# Altium PCB H_Bridge.PcbDoc
Units mm, origin at the board's own origin, x right, y up, seen from the top; angles counter-clockwise.
Board outline 48.39 x 49.28 mm, 2 copper layers (Top Layer, Bottom Layer); 27 components, 16 nets, 72 pads, 395 vias.
Unrouted connection lines stored in the file: 4.
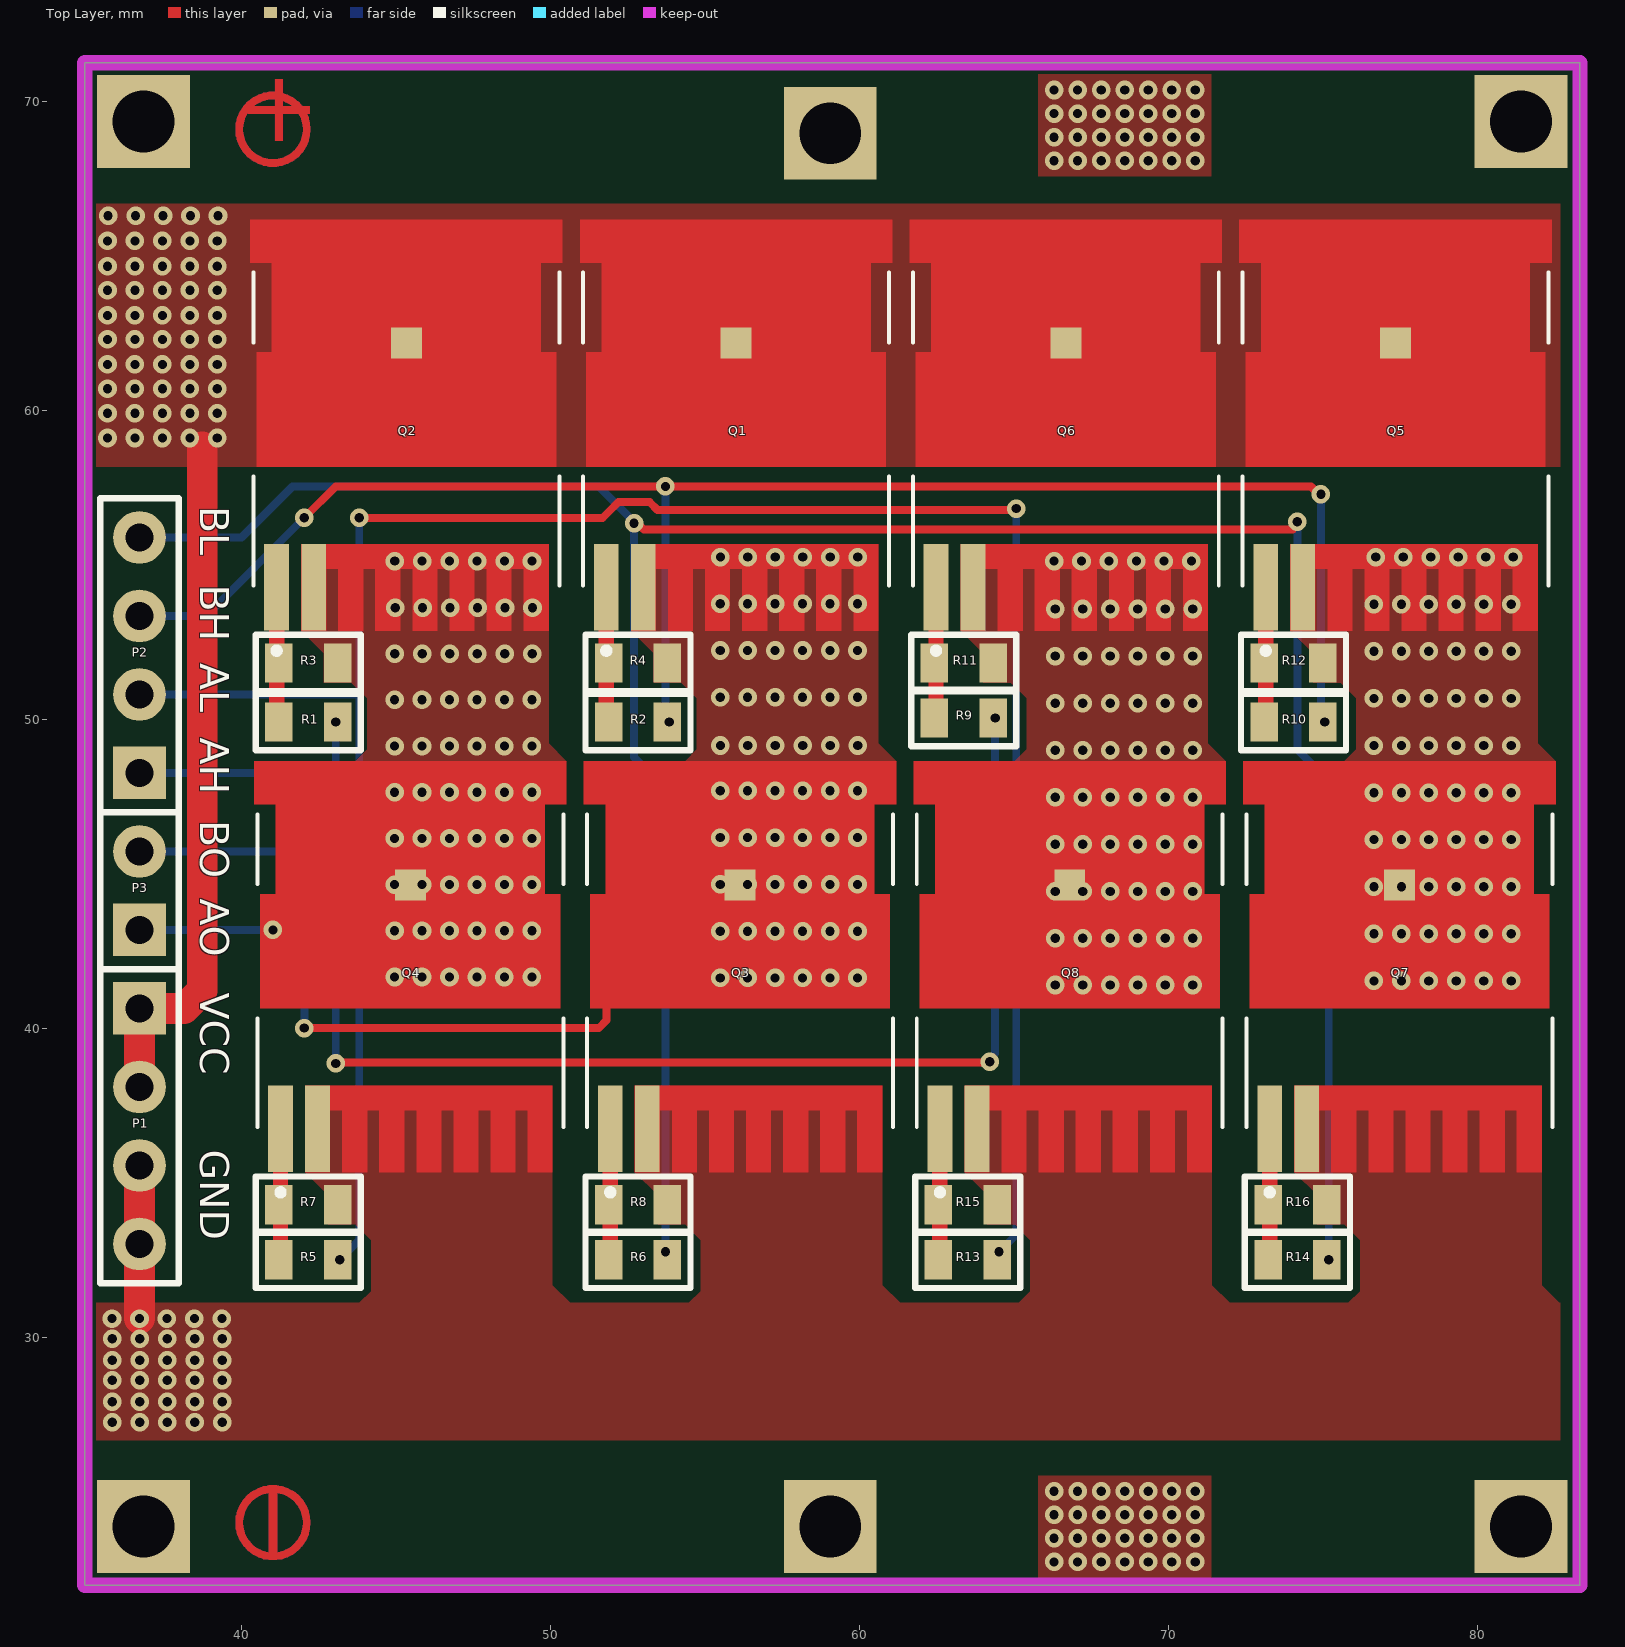
[diagram p0: Top Layer view]
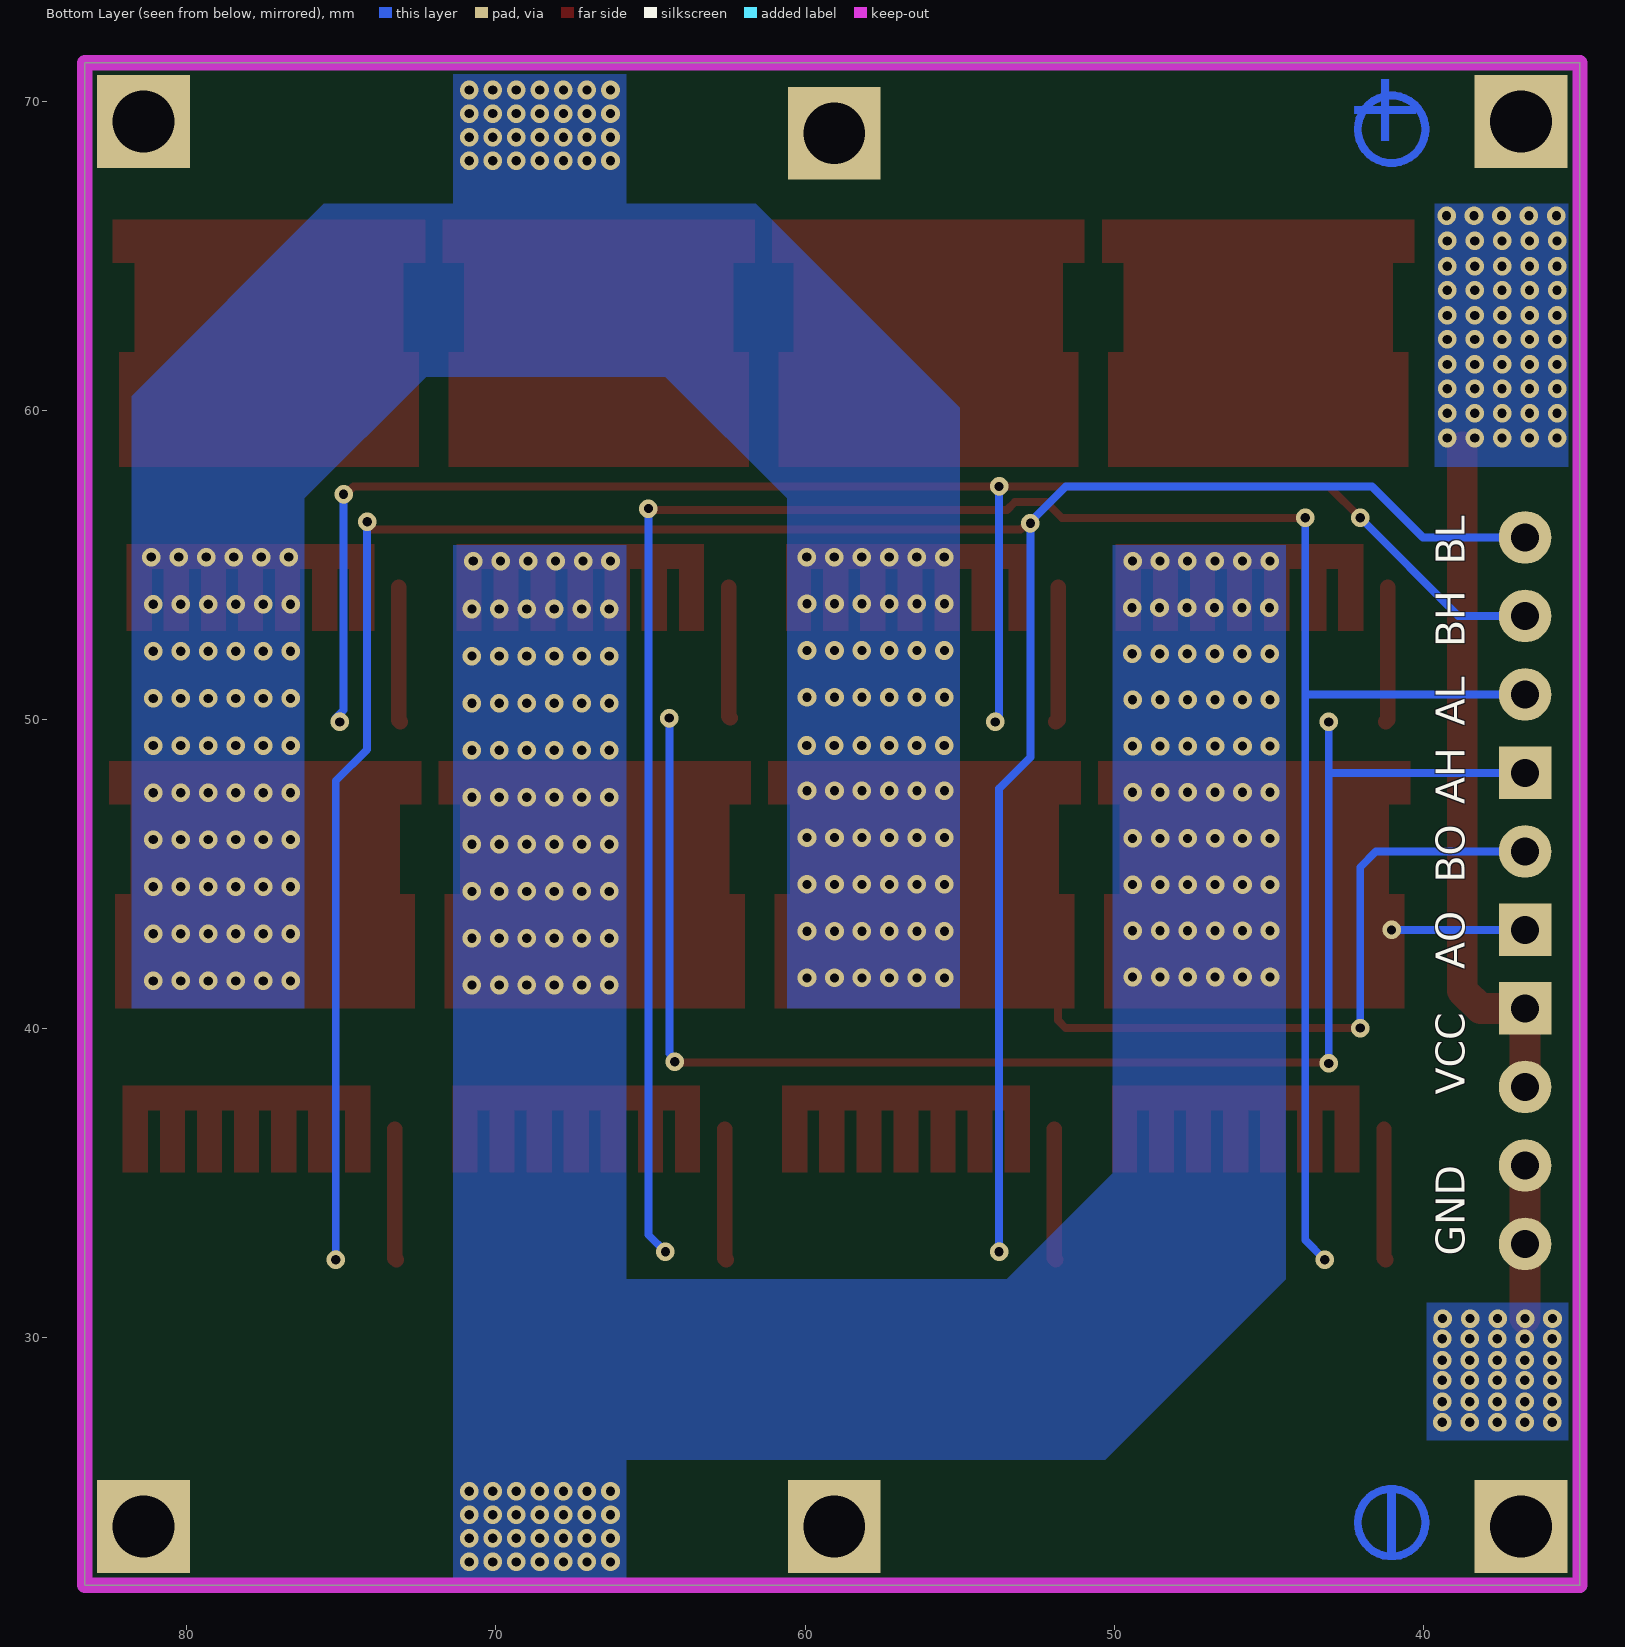
[diagram p1: Bottom Layer view, seen from below]

## Layer stack, top to bottom
Top Solder: solder mask 0.0102, Solder Resist, Dk 3.5
Top Layer: signal copper 0.0356
Dielectric 1: dielectric 0.32, FR-4, Dk 4.8
Bottom Layer: signal copper 0.0356
Bottom Solder: solder mask 0.0102, Solder Resist, Dk 3.5

## Board outline
34.925,21.971 83.312,21.971 83.312,71.247 34.925,71.247

## Design rules (kind name [scope] priority, off if disabled: settings)
Clearance [All] p1: gap=0.254 ignorepadtopadclearanceinfootprint=FALSE except(0: Arc-Hole Track-Hole SMDPad-Hole THPad-Hole Via-Hole Fill-Hole Poly-Hole Region-Hole Text-Hole)
PolygonConnect [All] p1: connectstyle=Direct reliefconductorwidth=0.254 reliefentries=4 polygonreliefangle="90 Angle" airgapwidth=0.254
RoutingVias [All] p1: holewidth=0.3 width=0.6 viastyle="Through Hole" minholewidth=0.3 minwidth=0.6 maxholewidth=0.711 maxwidth=1.27
SolderMaskExpansion [All] p1: expansion=0.102 istentingtop=FALSE
Width [All] p1: maxlimit=10 minlimit=0.254 preferedwidth=0.254
30 further rules are at their usual default settings.

## Components (designator, comment, footprint, x,y, rotation, side; value= is the part's Value field where it differs from the comment)
P1 "Header 4" HDR2.54-LI-4P 36.703,36.83 r270 top
P2 "Header 4" HDR2.54-LI-4P 36.703,52.07 r90 top
P3 "Header 2" HDR2.54-LI-2P 36.703,44.45 r90 top
Q1 "IPT015N10N5" HSOF-8 56.007,59.517 r90 top
Q2 "IPT015N10N5" HSOF-8 45.339,59.517 r90 top
Q3 "IPT015N10N5" HSOF-8 56.134,41.991 r90 top
Q4 "IPT015N10N5" HSOF-8 45.466,41.991 r90 top
Q5 "IPT015N10N5" HSOF-8 77.343,59.517 r90 top
Q6 "IPT015N10N5" HSOF-8 66.675,59.517 r90 top
Q7 "IPT015N10N5" HSOF-8 77.47,41.991 r90 top
Q8 "IPT015N10N5" HSOF-8 66.802,41.991 r90 top
R1 "0805" "R 0805_L" 42.164,49.911 r180 top value=1.8R
R2 "0805" "R 0805_L" 52.832,49.911 r0 top value=1.8R
R3 "0805" "R 0805_L" 42.164,51.816 r0 top value=10K
R4 "0805" "R 0805_L" 52.832,51.816 r180 top value=10K
R5 "0805" "R 0805_L" 42.164,32.512 r180 top value=1.8R
R6 "0805" "R 0805_L" 52.832,32.512 r0 top value=1.8R
R7 "0805" "R 0805_L" 42.164,34.29 r0 top value=10K
R8 "0805" "R 0805_L" 52.832,34.29 r180 top value=10K
R9 "0805" "R 0805_L" 63.373,50.038 r180 top value=1.8R
R10 "0805" "R 0805_L" 74.041,49.911 r0 top value=1.8R
R11 "0805" "R 0805_L" 63.373,51.816 r0 top value=10K
R12 "0805" "R 0805_L" 74.041,51.816 r180 top value=10K
R13 "0805" "R 0805_L" 63.5,32.512 r180 top value=1.8R
R14 "0805" "R 0805_L" 74.168,32.512 r0 top value=1.8R
R15 "0805" "R 0805_L" 63.5,34.29 r0 top value=10K
R16 "0805" "R 0805_L" 74.168,34.29 r180 top value=10K

## Footprints (in the part's own frame and the unit in brackets; to place one, negate y for a bottom-side part, rotate by r counter-clockwise, add the part's x,y. Pads: shape width x height; smd on the part's side, far side on the other; paste and mask are expansions set on the pad)
HDR2.54-LI-2P [mm] "排针，2脚"
  rect 1.7x1.7 hole 0.9: 1(-1.27,0)
  round 1.7 hole 0.9: 2(1.27,0)
  silkscreen extent -2.54,-1.27 2.54,1.27, body extent -2.54,-1.27 2.54,1.27, height 8.5
HDR2.54-LI-4P [mm] "排针，4脚"
  rect 1.7x1.7 hole 0.9: 1(-3.81,0)
  round 1.7 hole 0.9: 2(-1.27,0) 3(1.27,0) 4(3.81,0)
  silkscreen extent -5.08,-1.27 5.08,1.27, body extent -5.08,-1.27 5.08,1.27, height 8.5
HSOF-8 [mm]
  rect 2.8x0.8 smd: 1(-5.25,4.2) 2-8(-5.25,3)
  rect 1x1 smd: 9(2.65,0)
  Top Layer region: -1.35,-4.85 -1.35,4.85 2.35,4.85 2.35,4.35 5.25,4.35 5.25,5.05 6.65,5.05 6.65,-5.05 5.25,-5.05 5.25,-4.35 2.35,-4.35 2.35,-4.85
  Top Layer region: -6.65,3.4 -3.85,3.4 -3.85,-4.6 -6.65,-4.6 -6.65,-3.8 -4.65,-3.8 -4.65,-3.4 -6.65,-3.4 -6.65,-2.6 -4.65,-2.6 -4.65,-2.2 -6.65,-2.2 -6.65,-1.4 -4.65,-1.4 -4.65,-1 -6.65,-1 -6.65,-0.2 -4.65,-0.2 -4.65,0.2 -6.65,0.2 -6.65,1 -4.65,1 -4.65,1.4 -6.65,1.4 -6.65,2.2 -4.65,2.2 -4.65,2.6 -6.65,2.6
  silkscreen extent -7.4,-4.95 4.93,4.95, body extent -6.62,-5.08 6.6,5.08, height 2
"R 0805_L" [mil] "1/8W贴片电阻"
  rect 35x50 smd: 1(-37.4,0) 2(37.4,0)
  silkscreen extent -67,-36 67,36, body extent -39,-25 39,25, height 20

## Part data
P1 P2: "Header, 4-Pin", LatestRevisionDate=17-Jul-2002, LatestRevisionNote="Re-released for DXP Platform.", Publisher="Altium Limited"
P3: "Header, 2-Pin", LatestRevisionDate=17-Jul-2002, LatestRevisionNote="Re-released for DXP Platform.", Publisher="Altium Limited"
Q1 Q2 Q3 Q4 Q5 Q6 Q7 Q8: library part NMOS-HSOF-8
R1 R2 R3 R4 R5 R6 R7 R8 R9 R10 R11 R12 R13 R14 R15 R16: library part RES2, "Resistor", LatestRevisionDate=17-Jul-2002, LatestRevisionNote="Re-released for DXP Platform.", PackageDescription="Axial Device, Thru-Hole; 2 Leads; 0.3 in Pin Spacing", PackageReference=AXIAL-0.3, Published=8-Jun-2000, Publisher="Altium Limited"

## Free pads (board coordinates)
  rect 3x3 hole 2: 0(36.83,23.876) 0(36.83,69.342) 0(59.055,23.876) 0(59.055,68.961) 0(81.407,23.876) 0(81.407,69.342)

## Via types
v1: diameter 0.6, hole 0.3, Top Layer to Bottom Layer, tented both sides, 395 vias

## Nets (pads, with @x,y where several pads share a name; then routed paths per layer and width w, separated by ;. In a path a pad name is that pad's centre, name@x,y a point inside that pad or via, vN(x,y) a via of type N, cw(c..) or ccw(c..) an arc to the next point about the centre after c; other vN are vias at no path point)
AH: P2.1 R1.1 R9.1 | length 49.8
  Top Layer w0.254: v1(43.053,38.862) 43.082,38.891 64.187,38.891 v1(64.216,38.921)
  Bottom Layer w0.254: P2.1 43.053,48.26 ; v1(43.053,38.862) 43.053,48.26 ; v1(43.053,49.911) 43.053,48.26 ; v1(64.216,38.921) 64.216,39.014 64.389,39.187 v1(64.389,50.038)
AL: P2.2 R5.1 R13.1 | length 77.2
  Top Layer w0.254: v1(43.815,56.515) 51.689,56.515 52.197,57.023 53.213,57.023 53.467,56.769 65.021,56.769 v1(65.067,56.815)
  Bottom Layer w0.254: P2.2 43.815,50.8 ; v1(43.18,32.512) 43.815,33.147 43.815,50.8 ; v1(43.815,56.515) 43.815,50.8 ; v1(64.516,32.766) 65.07,33.32 65.07,56.812 v1(65.067,56.815)
AO: P3.1 Q2.2-8 Q4.9 Q6.2-8 Q8.9 R3.2 R11.2 | length 4.3
  Bottom Layer w0.254: P3.1 v1(41.021,43.18)
  other v1: 66.294,22.733 67.056,22.733 67.818,22.733 68.58,22.733 69.342,22.733 70.104,22.733 70.866,22.733 66.294,23.495 67.056,23.495 67.818,23.495 68.58,23.495 69.342,23.495 70.104,23.495 70.866,23.495 66.294,24.257 67.056,24.257 67.818,24.257 68.58,24.257 69.342,24.257 70.104,24.257 70.866,24.257 66.294,25.019 67.056,25.019 67.818,25.019 68.58,25.019 69.342,25.019 70.104,25.019 70.866,25.019 66.334,41.399 67.223,41.399 68.112,41.399 69.001,41.399 69.89,41.399 70.779,41.399 44.955,41.659 45.844,41.659 46.733,41.659 47.622,41.659 48.511,41.659 49.4,41.659 66.334,42.913 67.223,42.913 68.112,42.913 69.001,42.913 69.89,42.913 70.779,42.913 44.955,43.153 45.844,43.153 46.733,43.153 47.622,43.153 48.511,43.153 49.4,43.153 66.334,44.426 67.223,44.426 68.112,44.426 69.001,44.426 69.89,44.426 70.779,44.426 44.955,44.648 45.844,44.648 46.733,44.648 47.622,44.648 48.511,44.648 49.4,44.648 66.334,45.95 67.223,45.95 68.112,45.95 69.001,45.95 69.89,45.95 70.779,45.95 44.955,46.142 45.844,46.142 46.733,46.142 47.622,46.142 48.511,46.142 49.4,46.142 66.334,47.473 67.223,47.473 68.112,47.473 69.001,47.473 69.89,47.473 70.779,47.473 44.955,47.637 45.844,47.637 46.733,47.637 47.622,47.637 48.511,47.637 49.4,47.637 66.334,48.996 67.223,48.996 68.112,48.996 69.001,48.996 69.89,48.996 70.779,48.996 44.955,49.132 45.844,49.132 46.733,49.132 47.622,49.132 48.511,49.132 49.4,49.132 66.334,50.519 67.223,50.519 68.112,50.519 69.001,50.519 69.89,50.519 70.779,50.519 44.955,50.626 45.844,50.626 46.733,50.626 47.622,50.626 48.511,50.626 49.4,50.626 66.334,52.042 67.223,52.042 68.112,52.042 69.001,52.042 69.89,52.042 70.779,52.042 44.965,52.121 45.854,52.121 46.743,52.121 47.632,52.121 48.521,52.121 49.41,52.121 66.334,53.566 67.223,53.566 68.112,53.566 69.001,53.566 69.89,53.566 70.779,53.566 44.974,53.606 45.863,53.606 46.752,53.606 47.641,53.606 48.53,53.606 49.419,53.606 44.958,55.118 45.847,55.118 46.736,55.118 47.625,55.118 48.514,55.118 49.403,55.118 66.294,55.118 67.183,55.118 68.072,55.118 68.961,55.118 69.85,55.118 70.739,55.118
BH: P2.3 R2.2 R10.2 | length 55.3
  Top Layer w0.254: v1(42.037,56.515) 43.053,57.531 v1(53.721,57.531) 74.608,57.531 74.862,57.277 v1(74.93,57.277)
  Bottom Layer w0.254: P2.3 38.862,53.34 v1(42.037,56.515) ; v1(53.721,57.531) 53.721,50.132 53.848,50.005 v1(53.848,49.911) ; v1(74.93,57.277) 74.93,50.292 75.184,50.038 v1(75.057,49.911)
BL: P2.4 R6.2 R14.2 | length 87.2
  Top Layer w0.254: v1(52.705,56.342) 52.819,56.342 53.027,56.134 74.019,56.134 74.019,56.146 74.168,56.294 v1(74.168,56.388)
  Bottom Layer w0.254: P2.4 40.005,55.88 41.656,57.531 51.562,57.531 52.705,56.388 52.705,48.768 53.721,47.752 v1(53.721,32.766) ; v1(74.168,56.388) 74.168,49.022 75.184,48.006 v1(75.184,32.512)
BO: P3.2 Q1.2-8 Q3.9 Q5.2-8 Q7.9 R4.1 R12.1 | length 21.1
  Top Layer w0.254: v1(42.037,40.005) 51.562,40.005 51.816,40.259 51.816,40.767
  Bottom Layer w0.254: P3.2 41.529,45.72 42.037,45.212 v1(42.037,40.005)
  other v1: 76.645,41.532 77.534,41.532 78.423,41.532 79.312,41.532 80.201,41.532 81.09,41.532 55.49,41.628 56.379,41.628 57.268,41.628 58.157,41.628 59.046,41.628 59.935,41.628 76.645,43.057 77.534,43.057 78.423,43.057 79.312,43.057 80.201,43.057 81.09,43.057 55.49,43.141 56.379,43.141 57.268,43.141 58.157,43.141 59.046,43.141 59.935,43.141 76.645,44.582 77.534,44.582 78.423,44.582 79.312,44.582 80.201,44.582 81.09,44.582 55.49,44.655 56.379,44.655 57.268,44.655 58.157,44.655 59.046,44.655 59.935,44.655 76.645,46.107 77.534,46.107 78.423,46.107 79.312,46.107 80.201,46.107 81.09,46.107 55.49,46.169 56.379,46.169 57.268,46.169 58.157,46.169 59.046,46.169 59.935,46.169 76.645,47.622 77.534,47.622 78.423,47.622 79.312,47.622 80.201,47.622 81.09,47.622 55.49,47.682 56.379,47.682 57.268,47.682 58.157,47.682 59.046,47.682 59.935,47.682 55.499,49.149 56.388,49.149 57.277,49.149 58.166,49.149 59.055,49.149 59.944,49.149 76.645,49.147 77.534,49.147 78.423,49.147 79.312,49.147 80.201,49.147 81.09,49.147 76.645,50.671 77.534,50.671 78.423,50.671 79.312,50.671 80.201,50.671 81.09,50.671 55.49,50.71 56.379,50.71 57.268,50.71 58.157,50.71 59.046,50.71 59.935,50.71 76.645,52.196 77.534,52.196 78.423,52.196 79.312,52.196 80.201,52.196 81.09,52.196 55.49,52.223 56.379,52.223 57.268,52.223 58.157,52.223 59.046,52.223 59.935,52.223 76.645,53.721 77.534,53.721 78.423,53.721 79.312,53.721 80.201,53.721 81.09,53.721 55.49,53.737 56.379,53.737 57.268,53.737 58.157,53.737 59.046,53.737 59.935,53.737 55.499,55.245 56.388,55.245 57.277,55.245 58.166,55.245 59.055,55.245 59.944,55.245 76.708,55.245 77.597,55.245 78.486,55.245 79.375,55.245 80.264,55.245 81.153,55.245 66.294,68.072 67.056,68.072 67.818,68.072 68.58,68.072 69.342,68.072 70.104,68.072 70.866,68.072 66.294,68.834 67.056,68.834 67.818,68.834 68.58,68.834 69.342,68.834 70.104,68.834 70.866,68.834 66.294,69.596 67.056,69.596 67.818,69.596 68.58,69.596 69.342,69.596 70.104,69.596 70.866,69.596 66.294,70.358 67.056,70.358 67.818,70.358 68.58,70.358 69.342,70.358 70.104,70.358 70.866,70.358
GND: P1.3 P1.4 Q3.2-8 Q4.2-8 Q7.2-8 Q8.2-8 R7.2 R8.1 R15.2 R16.1 | length 5
  Top Layer w1: v1(36.703,30.607) P1.4 P1.3
  other v1: 35.824,27.252 36.713,27.252 37.602,27.252 38.491,27.252 39.38,27.252 35.824,27.918 36.713,27.918 37.602,27.918 38.491,27.918 39.38,27.918 35.824,28.609 36.713,28.609 37.602,28.609 38.491,28.609 39.38,28.609 35.824,29.257 36.713,29.257 37.602,29.257 38.491,29.257 39.38,29.257 35.824,29.957 36.713,29.957 37.602,29.957 38.491,29.957 39.38,29.957 35.814,30.607 37.592,30.607 38.481,30.607 39.37,30.607
NetQ1_1: Q1.1 R2.1 R4.2 | length 8.7
  Top Layer w0.5: R2.1 R2.1@51.807,49.986 ; R2.1@51.807,49.986 Q1.1 R2.1@51.807,49.986
NetQ2_1: Q2.1 R1.2 R3.1 | length 8.7
  Top Layer w0.5: R1.2 R1.2@41.139,49.986 ; R1.2@41.139,49.986 Q2.1 R1.2@41.139,49.986
NetQ3_1: Q3.1 R6.1 R8.2 | length 8.4
  Top Layer w0.5: R6.1 R6.1@51.934,32.564 ; R6.1@51.934,32.564 Q3.1 R6.1@51.934,32.564
NetQ4_1: Q4.1 R5.2 R7.1 | length 8.4
  Top Layer w0.5: R5.2 R5.2@41.266,32.564 ; R5.2@41.266,32.564 Q4.1 R5.2@41.266,32.564
NetQ5_1: Q5.1 R10.1 R12.2 | length 8.7
  Top Layer w0.5: R10.1 R10.1@73.143,49.963 ; R10.1@73.143,49.963 Q5.1 R10.1@73.143,49.963
NetQ6_1: Q6.1 R9.2 R11.1 | length 8.4
  Top Layer w0.5: R9.2 R9.2@62.475,50.09 ; R9.2@62.475,50.09 Q6.1 R9.2@62.475,50.09
NetQ7_1: Q7.1 R14.1 R16.2 | length 8.4
  Top Layer w0.5: R14.1 R14.1@73.27,32.564 ; R14.1@73.27,32.564 Q7.1 R14.1@73.27,32.564
NetQ8_1: Q8.1 R13.2 R15.1 | length 8.4
  Top Layer w0.5: R13.2 R13.2@62.602,32.564 ; R13.2@62.602,32.564 Q8.1 R13.2@62.602,32.564
VCC: P1.1 P1.2 Q1.9 Q2.9 Q5.9 Q6.9 | length 22.4
  Top Layer w1: P1.2 P1.1 38.149,40.64 38.735,41.226 38.735,58.801
  other v1: 35.667,59.099 36.556,59.099 37.445,59.099 38.334,59.099 39.223,59.099 35.667,59.896 36.556,59.896 37.445,59.896 38.334,59.896 39.223,59.896 35.667,60.693 36.556,60.693 37.445,60.693 38.334,60.693 39.223,60.693 35.667,61.48 36.556,61.48 37.445,61.48 38.334,61.48 39.223,61.48 35.667,62.287 36.556,62.287 37.445,62.287 38.334,62.287 39.223,62.287 35.667,63.065 36.556,63.065 37.445,63.065 38.334,63.065 39.223,63.065 35.667,63.882 36.556,63.882 37.445,63.882 38.334,63.882 39.223,63.882 35.667,64.659 36.556,64.659 37.445,64.659 38.334,64.659 39.223,64.659 35.667,65.476 36.556,65.476 37.445,65.476 38.334,65.476 39.223,65.476 35.687,66.294 36.576,66.294 37.465,66.294 38.354,66.294 39.243,66.294
copper on no net: | length 31.5
  Top Layer w0.254: 42.113,24.003 ccw(c41.021,24.003) 42.113,24.003 ; 42.113,69.088 ccw(c41.021,69.088) 42.113,69.088
  Top Layer w0.3: 41.021,22.987 41.021,25.019
  Bottom Layer w0.254: 42.113,24.003 ccw(c41.021,24.003) 42.113,24.003 ; 42.113,69.088 ccw(c41.021,69.088) 42.113,69.088
  Bottom Layer w0.3: 41.021,22.987 41.021,25.019

## Polygon pours and split planes (outlines as drawn)
BO on Top Layer "NONET_L01_P-001" (solid, pour order 25): 65.786,70.866 65.786,67.564 71.374,67.564 71.374,70.866
AO on Top Layer "NONET_L01_P-001" (solid, pour order 23): 65.786,25.527 71.374,25.527 71.374,22.225 65.786,22.225
GND on Top Layer "NONET_L01_P-001" (solid, remove dead copper, pour order 10): 74.07,38.141 74.07,35.341 74.803,34.608 74.803,33.655 75.692,33.655 76.2,33.147 76.2,31.496 75.819,31.115 75.819,30.988 82.52,30.988 82.647,31.115 82.07,31.692 82.07,38.141
GND on Top Layer "NONET_L01_P-001" (solid, remove dead copper, pour order 9): 63.402,38.141 63.402,35.341 64.135,34.608 64.135,33.655 65.024,33.655 65.532,33.147 65.532,31.496 65.151,31.115 65.151,30.988 71.852,30.988 71.979,31.115 71.402,31.692 71.402,38.141
GND on Top Layer "NONET_L01_P-001" (solid, remove dead copper, pour order 8): 52.734,38.141 52.734,35.341 53.467,34.608 53.467,33.655 54.356,33.655 54.864,33.147 54.864,31.496 54.483,31.115 54.483,30.988 61.184,30.988 61.311,31.115 60.734,31.692 60.734,38.141
GND on Top Layer "NONET_L01_P-001" (solid, remove dead copper, pour order 7): 42.066,38.141 42.066,35.341 42.799,34.608 42.799,33.655 43.688,33.655 44.196,33.147 44.196,31.496 43.815,31.115 43.815,30.988 50.516,30.988 50.643,31.115 50.066,31.692 50.066,38.141
GND on Top Layer "NONET_L01_P-001" (solid, pour order 6): 35.306,31.115 35.306,26.67 82.677,26.67 82.677,31.115
BO on Top Layer "NONET_L01_P-001" (solid, remove dead copper, pour order 5): 73.943,55.667 73.943,52.867 74.676,52.134 74.676,51.181 75.565,51.181 76.073,50.673 76.073,49.022 75.692,48.641 75.692,48.514 82.393,48.514 82.52,48.641 81.943,49.218 81.943,55.667
AO on Top Layer "NONET_L01_P-001" (solid, remove dead copper, pour order 3): 63.275,55.667 63.275,52.867 64.008,52.134 64.008,51.181 64.897,51.181 65.405,50.673 65.405,49.022 65.024,48.641 65.024,48.514 71.725,48.514 71.852,48.641 71.275,49.218 71.275,55.667
BO on Top Layer "NONET_L01_P-001" (solid, remove dead copper, pour order 2): 52.607,55.667 52.607,52.867 53.34,52.134 53.34,51.181 54.229,51.181 54.737,50.673 54.737,49.022 54.356,48.641 54.356,48.514 61.057,48.514 61.184,48.641 60.607,49.218 60.607,55.667
AO on Top Layer "NONET_L01_P-001" (solid, pour order 1): 41.939,55.667 41.939,52.867 42.672,52.134 42.672,51.181 43.561,51.181 44.069,50.673 44.069,49.022 43.688,48.641 43.688,48.514 50.389,48.514 50.516,48.641 49.939,49.218 49.939,55.667
VCC on Top Layer "NONET_L01_P-001" (solid, pour order 0): 35.306,66.675 35.306,58.167 82.677,58.167 82.677,66.675
no net on Top Solder "NONET_L01_P-001" (solid): 65.786,70.866 65.786,67.691 71.374,67.691 71.374,70.866
no net on Top Solder "NONET_L01_P-001" (solid): 65.786,25.527 71.374,25.527 71.374,22.225 65.786,22.225
no net on Top Solder "NONET_L01_P-001" (solid): 82.677,58.166 82.677,66.675 35.306,66.675 35.306,58.166
no net on Top Solder "NONET_L01_P-001" (solid): 35.306,31.115 35.306,26.67 82.677,26.67 82.677,31.115
no net on Top Solder "NONET_L01_P-001" (solid): 42.016,38.191 42.016,35.327 44.196,33.147 44.196,31.496 43.815,31.115 50.673,31.115 50.116,31.672 50.116,38.191
no net on Top Solder "NONET_L01_P-001" (solid): 52.684,38.191 52.684,35.327 54.864,33.147 54.864,31.496 54.483,31.115 61.341,31.115 60.784,31.672 60.784,38.191
no net on Top Solder "NONET_L01_P-001" (solid): 63.352,38.191 63.352,35.327 65.532,33.147 65.532,31.496 65.151,31.115 72.009,31.115 71.452,31.672 71.452,38.191
no net on Top Solder "NONET_L01_P-001" (solid): 74.02,38.191 74.02,35.327 76.2,33.147 76.2,31.496 75.819,31.115 82.677,31.115 82.12,31.672 82.12,38.191
no net on Top Solder "NONET_L01_P-001" (solid): 73.893,55.717 73.893,52.853 76.073,50.673 76.073,49.022 75.692,48.641 82.55,48.641 81.993,49.198 81.993,55.717
no net on Top Solder "NONET_L01_P-001" (solid): 63.225,55.717 63.225,52.853 65.405,50.673 65.405,49.022 65.024,48.641 71.882,48.641 71.325,49.198 71.325,55.717
no net on Top Solder "NONET_L01_P-001" (solid): 52.557,55.717 52.557,52.853 54.737,50.673 54.737,49.022 54.356,48.641 61.214,48.641 60.657,49.198 60.657,55.717
GND on Top Solder "NONET_L01_P-001" (solid): 41.889,55.717 41.889,52.853 44.069,50.673 44.069,49.022 43.688,48.641 50.546,48.641 49.989,49.198 49.989,55.717
BO on Bottom Layer "NONET_L01_P-001" (solid, pour order 31): 54.991,57.15 54.991,60.071 61.595,66.675 75.565,66.675 81.788,60.452 81.788,57.15 76.2,57.15 72.263,61.087 64.516,61.087 60.579,57.15
AO on Bottom Layer "NONET_L01_P-001" (solid, pour order 29): 53.467,31.877 50.038,35.306 46.609,31.877 44.45,31.877 50.292,26.035 65.786,26.035 65.786,31.877
BO on Bottom Layer "NONET_L01_P-001" (solid, pour order 24): 65.786,66.675 65.786,70.866 71.374,70.866 71.374,66.675
GND on Bottom Layer "NONET_L01_P-001" (solid, pour order 22): 35.306,31.115 39.878,31.115 39.878,26.67 35.306,26.67
VCC on Bottom Layer "NONET_L01_P-001" (solid, pour order 21): 35.306,66.675 35.306,58.166 39.624,58.166 39.624,66.675
BO on Bottom Layer "NONET_L01_P-001" (solid, pour order 16): 76.2,40.64 76.2,57.15 81.788,57.15 81.788,40.64
BO on Bottom Layer "NONET_L01_P-001" (solid, pour order 15): 54.991,40.64 54.991,57.15 60.579,57.15 60.579,40.64
AO on Bottom Layer "NONET_L01_P-001" (solid, pour order 13): 65.786,55.626 65.786,22.225 71.374,22.225 71.374,55.626
AO on Bottom Layer "NONET_L01_P-001" (solid, pour order 12): 44.45,55.626 44.45,31.877 50.038,31.877 50.038,55.626
no net on Bottom Solder "NONET_L01_P-001" (solid): 54.991,57.15 54.991,60.071 61.595,66.675 75.565,66.675 81.788,60.452 81.788,57.15 76.2,57.15 72.263,61.087 64.516,61.087 60.579,57.15
no net on Bottom Solder "NONET_L01_P-001" (solid): 60.579,57.15 64.516,61.087
no net on Bottom Solder "NONET_L01_P-001" (solid): 53.467,31.877 50.038,35.306 47.879,35.306 44.45,31.877 50.292,26.035 65.786,26.035 65.786,31.877
no net on Bottom Solder "NONET_L01_P-001" (solid): 65.786,66.675 65.786,70.866 71.374,70.866 71.374,66.675
no net on Bottom Solder "NONET_L01_P-001" (solid): 35.306,66.675 39.624,66.675 39.624,58.166 35.306,58.166
no net on Bottom Solder "NONET_L01_P-001" (solid): 35.306,31.115 39.878,31.115 39.878,26.67 35.306,26.67
no net on Bottom Solder "NONET_L01_P-001" (solid): 35.306,31.115
no net on Bottom Solder "NONET_L01_P-001" (solid): 76.2,40.64 81.788,40.64 81.788,57.15 76.2,57.15
no net on Bottom Solder "NONET_L01_P-001" (solid): 54.991,40.64 60.579,40.64 60.579,57.15 54.991,57.15
no net on Bottom Solder "NONET_L01_P-001" (solid): 65.786,55.626 71.374,55.626 71.374,22.225 65.786,22.225
no net on Bottom Solder "NONET_L01_P-001" (solid): 44.45,55.626 50.038,55.626 50.038,31.877 44.45,31.877

## Keep-outs
Keep-Out Layer:
  the board outline again, w0.5

## Other copper
Top Layer:
  text "+" at 39.878,67.945 h4
Bottom Layer:
  text "+" at 39.878,67.945 h4

## Silkscreen, mask and mechanical layers (free items; w line width, h text height)
Top Overlay:
  text "BL" at 38.354,56.896 h1.6 r270
  text "BH" at 38.354,54.356 h1.6 r270
  text "AL" at 38.354,51.816 h1.6 r270
  text "AH" at 38.354,49.403 h1.6 r270
  text "BO" at 38.354,46.736 h1.6 r270
  text "AO" at 38.354,44.196 h1.6 r270
  text "VCC" at 38.354,41.148 h1.6 r270
  text "GND" at 38.354,36.068 h1.6 r270
Bottom Overlay:
  text "BL" at 38.354,54.991 h1.6 r270
  text "BH" at 38.354,52.324 h1.6 r270
  text "AL" at 38.354,49.784 h1.6 r270
  text "AH" at 38.354,47.244 h1.6 r270
  text "BO" at 38.354,44.704 h1.6 r270
  text "AO" at 38.354,41.91 h1.6 r270
  text "VCC" at 38.354,37.846 h1.6 r270
  text "GND" at 38.354,32.639 h1.6 r270
Top Solder:
  circle w0.254: c41.021,24.003 r1.092
  circle w0.254: c41.021,69.088 r1.092
  lines w0.3: 41.021,22.987 41.021,25.019
  text "+" at 39.878,67.945 h4
Bottom Solder:
  circle w0.254: c41.021,24.003 r1.092
  circle w0.254: c41.021,69.088 r1.092
  lines w0.3: 41.021,22.987 41.021,25.019
  text "+" at 39.878,67.945 h4

## Dimensions
83.312,21.971 to 83.312,71.247 on Top Overlay
34.925,71.247 to 83.312,71.247 on Top Overlay
59.055,23.495 to 36.83,23.876 on Top Overlay
36.83,69.342 to 59.055,68.961 on Top Overlay
36.83,69.342 to 81.407,69.342 on Top Overlay